# Altium PCB ILI2511_FPC_TX23RX41_20170830.PcbDoc
Units mm, origin at the board's own origin, x right, y up, seen from the top; angles counter-clockwise.
Board outline 60.1 x 74 mm, 2 copper layers (Top Layer, Bottom Layer); 3 components, 65 nets, 145 pads, 110 vias.
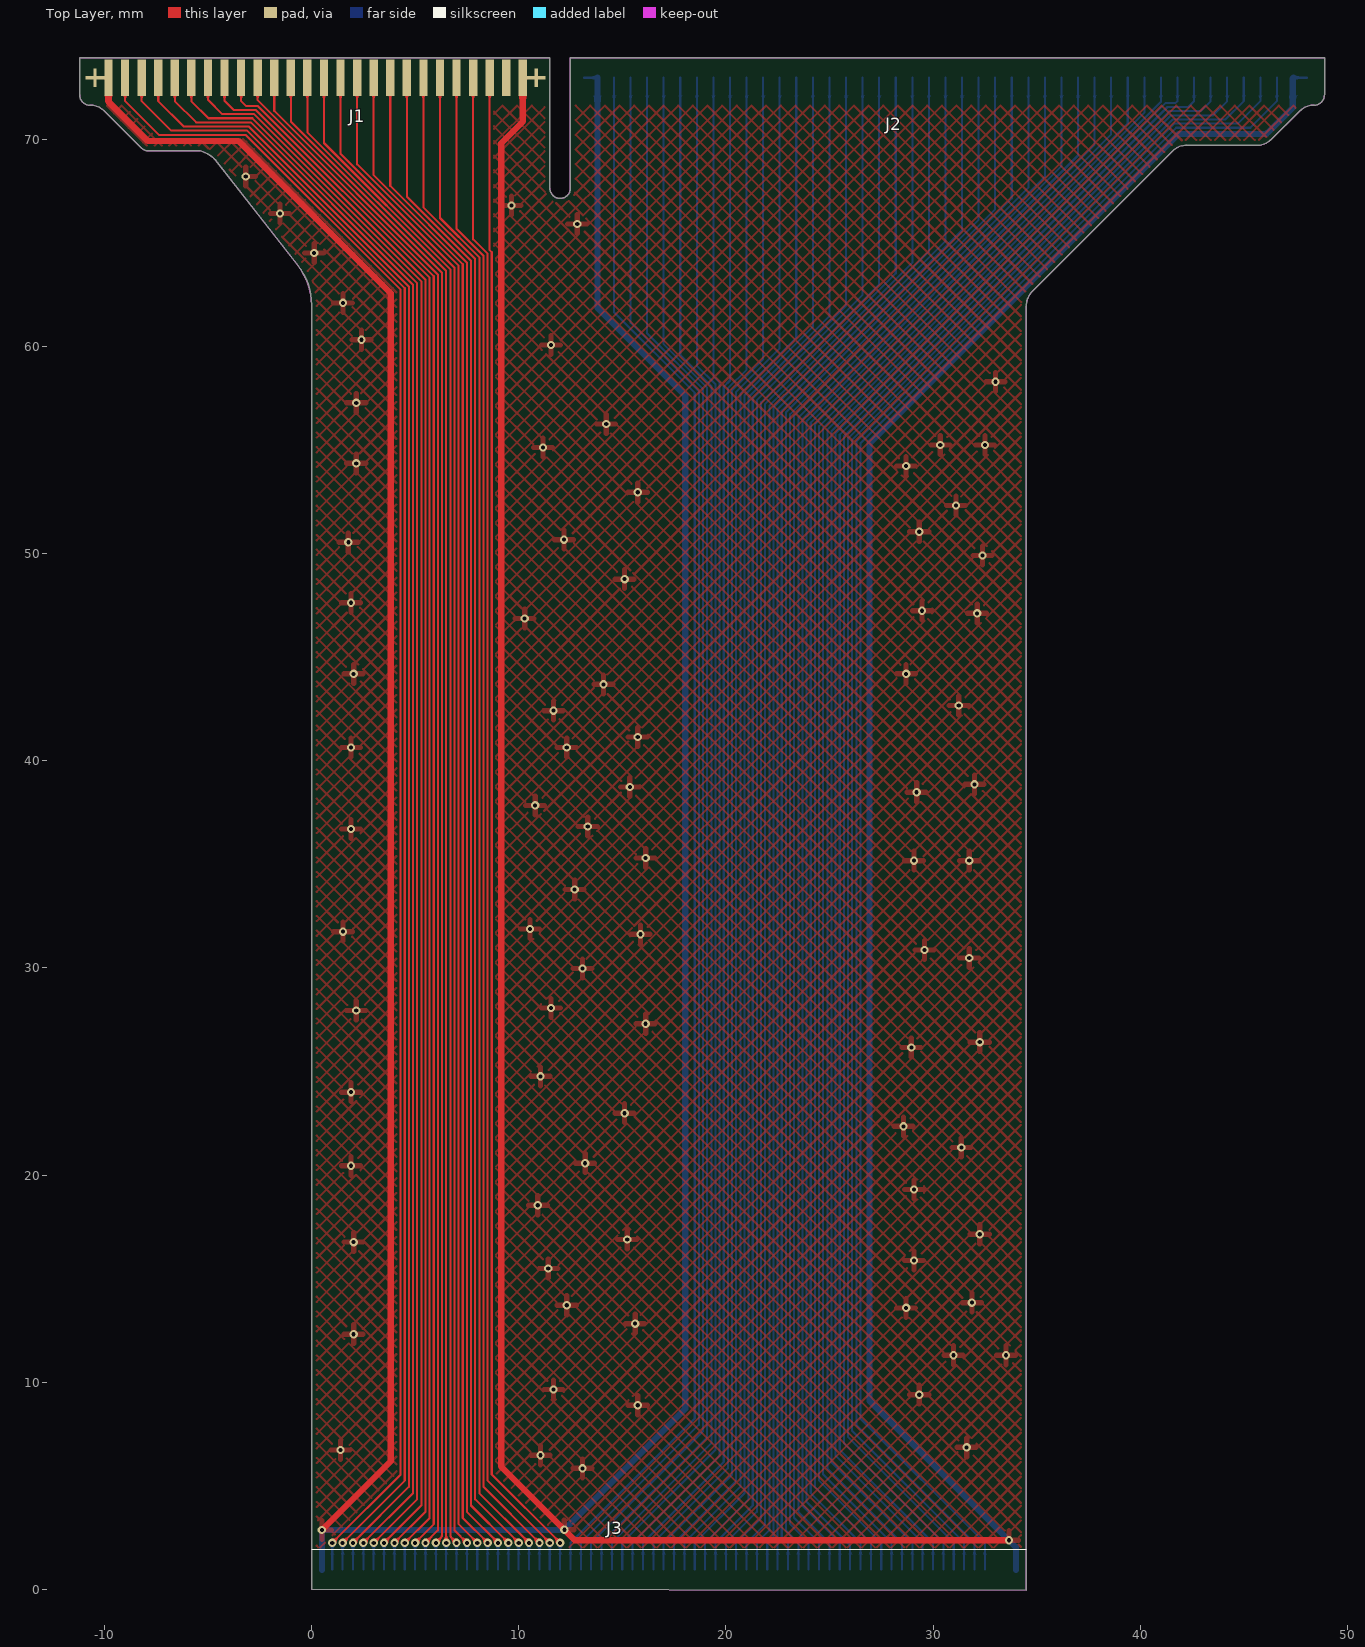
[diagram p0: Top Layer view]
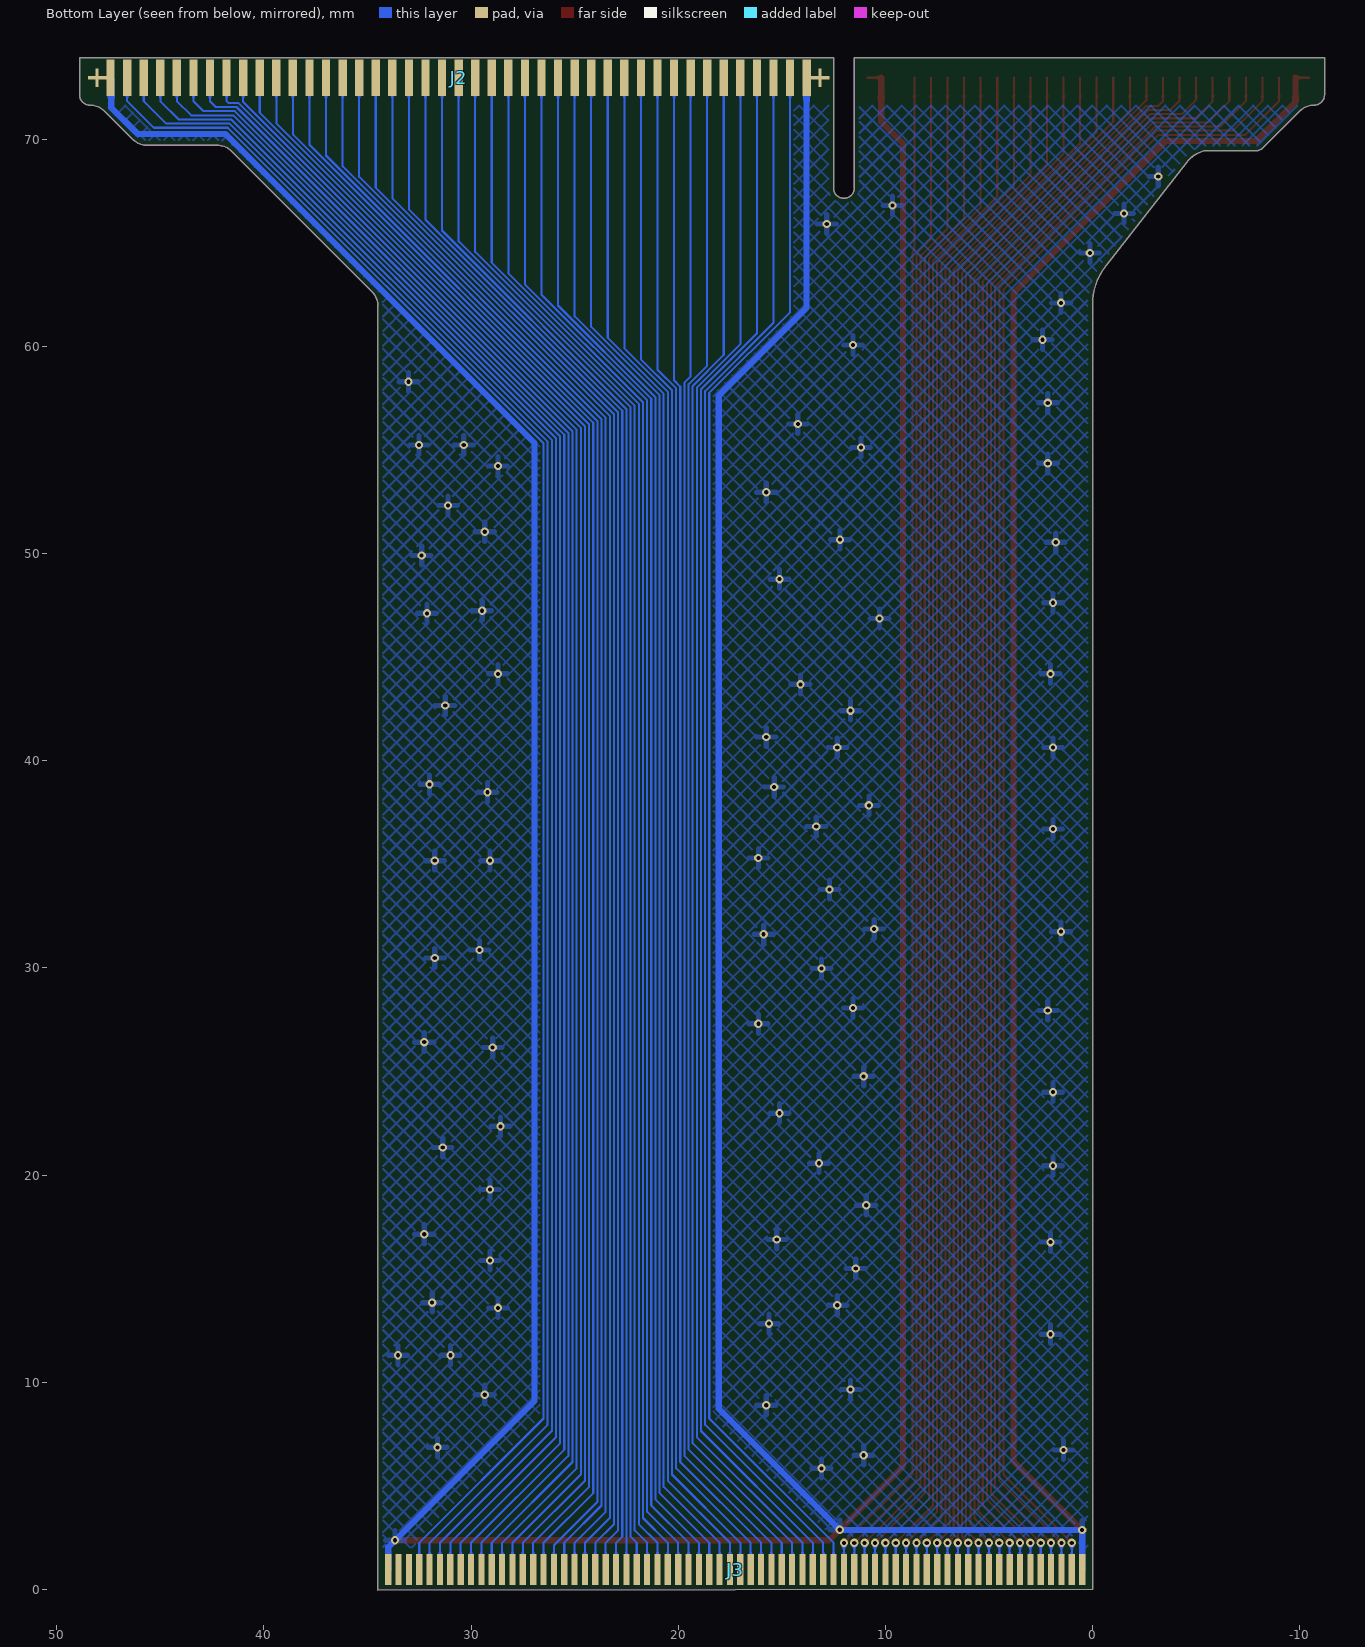
[diagram p1: Bottom Layer view, seen from below]

## Layer stack, top to bottom
Top Solder: solder mask 0.0102, Solder Resist, Dk 3.5
Top Layer: signal copper 0.0356
Dielectric 1: dielectric 0.32, FR-4, Dk 4.8
Bottom Layer: signal copper 0.0356
Bottom Solder: solder mask 0.0102, Solder Resist, Dk 3.5

## Board outline
0,0 0,62 ccw(c-3.1,62) -0.657,63.909 -4.547,68.888 ccw(c-5.762,67.967) -5.372,69.44 -7.872,69.44 cw(c-7.872,69.94) -8.225,69.587 -9.993,71.355 ccw(c-10.7,70.647) -10.7,71.647 cw(c-10.7,72.147) -11.2,72.147 -11.2,73.947 11.5,73.947 11.5,67.647 ccw(c12,67.647) 12.5,67.647 12.5,73.947 48.9,73.947 48.9,72.147 cw(c48.4,72.147) 48.4,71.647 ccw(c48.4,70.647) 47.693,71.355 46.339,70.001 cw(c45.632,70.708) 45.632,69.708 42.229,69.708 ccw(c42.229,68.784) 41.576,69.437 34.793,62.655 ccw(c35.5,61.947) 34.5,61.947 34.5,-0.053

## Design rules (kind name [scope] priority, off if disabled: settings)
Clearance Clearance_1 [InNetClass('All Nets') vs InNetClass('All Nets')] p1: gap=0.1
Clearance [OnLayer('Keep-Out Layer')] p2: gap=0.2 except(0: Arc-SMDPad Track-SMDPad)
MinimumSolderMaskSliver [All] p1: minsoldermaskwidth=0.1
PolygonConnect [All] p1: connectstyle=Relief reliefconductorwidth=0.254 reliefentries=4 polygonreliefangle="90 Angle" airgapwidth=0.254
RoutingVias [All] p1: holewidth=0.2 width=0.4 viastyle="Through Hole" minholewidth=0.2 minwidth=0.4 maxholewidth=0.711 maxwidth=1.27
SilkToSolderMaskClearance [IsPad] p1: minsilkscreentomaskgap=0 clearancetoexposedcopper=TRUE
SolderMaskExpansion [All] p1: expansion=0.102
Width [All] p1: maxlimit=0.5 minlimit=0.1 preferedwidth=0.1
28 further rules are at their usual default settings.

## Components (designator, comment, footprint, x,y, rotation, side; value= is the part's Value field where it differs from the comment)
J1 "CON-26PIN" CON_26PIN -10,72.097 r0 top
J2 "CON_43PIN" CON_43PIN 13.6,72.097 r0 top locked
J3 "CON_68PIN" CON-68PIN 0.35,0.2 r0 top locked

## Footprints (in the part's own frame and the unit in brackets; to place one, negate y for a bottom-side part, rotate by r counter-clockwise, add the part's x,y. Pads: shape width x height; smd on the part's side, far side on the other; paste and mask are expansions set on the pad)
CON-68PIN [mm]
  rect 0.3x1.5 smd far side: 1(0.15,0.75) 2(0.65,0.75) 3(1.15,0.75) 4(1.65,0.75) 5(2.15,0.75) 6(2.65,0.75) 7(3.15,0.75) 8(3.65,0.75) 9(4.15,0.75) 10(4.65,0.75) 11(5.15,0.75) 12(5.65,0.75) 13(6.15,0.75) 14(6.65,0.75) 15(7.15,0.75) 16(7.65,0.75) 17(8.15,0.75) 18(8.65,0.75) 19(9.15,0.75) 20(9.65,0.75) 21(10.15,0.75) 22(10.65,0.75) 23(11.15,0.75) 24(11.65,0.75) 25(12.15,0.75) 26(12.65,0.75) 27(13.15,0.75) 28(13.65,0.75) 29(14.15,0.75) 30(14.65,0.75) 31(15.15,0.75) 32(15.65,0.75) 33(16.15,0.75) 34(16.65,0.75) 35(17.15,0.75) 36(17.65,0.75) 37(18.15,0.75) 38(18.65,0.75) 39(19.15,0.75) 40(19.65,0.75) 41(20.15,0.75) 42(20.65,0.75) 43(21.15,0.75) 44(21.65,0.75) 45(22.15,0.75) 46(22.65,0.75) 47(23.15,0.75) 48(23.65,0.75) 49(24.15,0.75) 50(24.65,0.75) 51(25.15,0.75) 52(25.65,0.75) 53(26.15,0.75) 54(26.65,0.75) 55(27.15,0.75) 56(27.65,0.75) 57(28.15,0.75) 58(28.65,0.75) 59(29.15,0.75) 60(29.65,0.75) 61(30.15,0.75) 62(30.65,0.75) 63(31.15,0.75) 64(31.65,0.75) 65(32.15,0.75) 66(32.65,0.75) 67(33.15,0.75) 68(33.65,0.75)
CON_26PIN [mm]
  rect 0.4x1.75 smd: 1(0.2,0.875) 2(1,0.875) 3(1.8,0.875) 4(2.6,0.875) 5(3.4,0.875) 6(4.2,0.875) 7(5,0.875) 8(5.8,0.875) 9(6.6,0.875) 10(7.4,0.875) 11(8.2,0.875) 12(9,0.875) 13(9.8,0.875) 14(10.6,0.875) 15(11.4,0.875) 16(12.2,0.875) 17(13,0.875) 18(13.8,0.875) 19(14.6,0.875) 20(15.4,0.875) 21(16.2,0.875) 22(17,0.875) 23(17.8,0.875) 24(18.6,0.875) 25(19.4,0.875) 26(20.2,0.875)
CON_43PIN [mm]
  rect 0.4x1.75 smd far side: 1(0.2,0.875) 2(1,0.875) 3(1.8,0.875) 4(2.6,0.875) 5(3.4,0.875) 6(4.2,0.875) 7(5,0.875) 8(5.8,0.875) 9(6.6,0.875) 10(7.4,0.875) 11(8.2,0.875) 12(9,0.875) 13(9.8,0.875) 14(10.6,0.875) 15(11.4,0.875) 16(12.2,0.875) 17(13,0.875) 18(13.8,0.875) 19(14.6,0.875) 20(15.4,0.875) 21(16.2,0.875) 22(17,0.875) 23(17.8,0.875) 24(18.6,0.875) 25(19.4,0.875) 26(20.2,0.875) 27(21,0.875) 28(21.8,0.875) 29(22.6,0.875) 30(23.4,0.875) 31(24.2,0.875) 32(25,0.875) 33(25.8,0.875) 34(26.6,0.875) 35(27.4,0.875) 36(28.2,0.875) 37(29,0.875) 38(29.8,0.875) 39(30.6,0.875) 40(31.4,0.875) 41(32.2,0.875) 42(33,0.875) 43(33.8,0.875)

## Free pads (board coordinates)
  rect 0.9x0.15 smd: 0(-10.45,72.972) 3(10.85,72.972)
  rect 0.15x0.9 smd: 0(-10.45,72.972) 2(10.85,72.972)
  rect 0.9x0.15 smd far side: 4(13.15,72.972) 6(48.05,72.972)
  rect 0.15x0.9 smd far side: 5(13.15,72.972) 7(48.05,72.972)

## Via types
v1: diameter 0.4, hole 0.2, Top Layer to Bottom Layer, tented both sides, 110 vias

## Nets (pads, with @x,y where several pads share a name; then routed paths per layer and width w, separated by ;. In a path a pad name is that pad's centre, name@x,y a point inside that pad or via, vN(x,y) a via of type N, cw(c..) or ccw(c..) an arc to the next point about the centre after c; other vN are vias at no path point)
ESD_DUMMY: J1.1 J1.26 J2.1 J2.43 J3.1 J3.68 pad.0 pad.2 pad.3 pad.4 pad.5 pad.6 pad.7 | length 349.6
  Top Layer w0.1: pad.0@-10.45,72.972 J1.1 ; J1.26 pad.2
  Top Layer w0.3: J1.1 -9.8,71.811 -7.905,69.917 -3.523,69.917 3.821,62.572 3.821,6.184 v1(0.5,2.863) ; J1.26 10.2,70.856 9.155,69.811 9.155,5.93 v1(12.203,2.882) 12.711,2.374 v1(33.666,2.374)
  Bottom Layer w0.1: pad.4 J2.1 ; J2.43 pad.6
  Bottom Layer w0.3: J3.1 v1(0.5,2.863) 12.184,2.863 v1(12.203,2.882) 18.045,8.724 18.045,57.619 13.8,61.864 J2.1 ; J3.68 34,2.041 v1(33.666,2.374) 26.935,9.105 26.935,55.333 41.859,70.258 46.091,70.258 46.164,70.331 46.174,70.331 47.363,71.52 47.363,72.935 J2.43
  other v1: 13.081,5.842 11.049,6.477 1.397,6.731 31.623,6.858 15.748,8.89 29.337,9.398 11.684,9.652 30.988,11.303 33.528,11.303 2.032,12.319 15.621,12.827 28.702,13.589 12.319,13.716 31.877,13.843 11.43,15.494 29.083,15.875 2.032,16.764 15.24,16.891 32.258,17.145 10.922,18.542 29.083,19.304 1.905,20.447 13.208,20.574 31.369,21.336 28.575,22.352 15.113,22.987 1.905,24.003 11.049,24.765 28.956,26.162 32.258,26.416 16.129,27.305 2.159,27.94 11.557,28.067 13.081,29.972 31.75,30.48 29.591,30.861 15.875,31.623 1.524,31.75 10.541,31.877 12.7,33.782 29.083,35.179 31.75,35.179 16.129,35.306 1.905,36.703 13.335,36.83 10.795,37.846 29.21,38.481 15.367,38.735 32.004,38.862 1.905,40.64 12.319,40.64 15.748,41.148 11.684,42.418 31.242,42.672 14.097,43.688 2.032,44.196 28.702,44.196 10.287,46.863 32.131,47.117 29.464,47.244 1.905,47.625 15.113,48.768 32.385,49.911 1.778,50.546 12.192,50.673 29.337,51.054 31.115,52.324 15.748,52.959 28.702,54.229 2.159,54.356 11.176,55.118 30.353,55.245 32.512,55.245 14.224,56.261 2.159,57.277 33.02,58.293 11.557,60.071 2.413,60.325 1.524,62.103 0.127,64.516 12.827,65.913 -1.524,66.421 9.652,66.802 -3.175,68.199
RX1: J2.2 J3.25 | length 76.1
  Bottom Layer w0.1: J3.25 12.5,2.247 18.5,8.247 18.5,57.759 14.6,61.659 J2.2
RX2: J2.3 J3.26 | length 75.8
  Bottom Layer w0.1: J3.26 13,2.247 18.7,7.947 18.7,57.842 15.4,61.142 J2.3
RX3: J2.4 J3.27 | length 75.4
  Bottom Layer w0.1: J3.27 13.5,2.247 18.9,7.647 18.9,57.925 16.2,60.625 J2.4
RX4: J2.5 J3.28 | length 75
  Bottom Layer w0.1: J3.28 14,2.247 19.1,7.347 19.1,58.008 17,60.108 J2.5
RX5: J2.6 J3.29 | length 74.6
  Bottom Layer w0.1: J3.29 14.5,2.247 19.3,7.047 19.3,58.091 17.8,59.591 J2.6
RX6: J2.7 J3.30 | length 74.3
  Bottom Layer w0.1: J3.30 15,2.247 19.5,6.747 19.5,58.174 18.6,59.074 J2.7
RX7: J2.8 J3.31 | length 73.9
  Bottom Layer w0.1: J3.31 15.5,2.247 19.7,6.447 19.7,58.256 19.4,58.556 J2.8
RX8: J2.9 J3.32 | length 73.8
  Bottom Layer w0.1: J3.32 16,2.247 19.9,6.147 19.9,58.056 20.2,58.357 J2.9
RX9: J2.10 J3.33 | length 73.9
  Bottom Layer w0.1: J3.33 16.5,2.247 20.1,5.847 20.1,57.974 21,58.874 J2.10
RX10: J2.11 J3.34 | length 74
  Bottom Layer w0.1: J3.34 17,2.247 20.3,5.547 20.3,57.891 21.8,59.391 J2.11
RX11: J2.12 J3.35 | length 74.1
  Bottom Layer w0.1: J3.35 17.5,2.247 20.5,5.247 20.5,57.808 22.6,59.908 J2.12
RX12: J2.13 J3.36 | length 74.3
  Bottom Layer w0.1: J3.36 18,2.247 20.7,4.947 20.7,57.725 23.4,60.425 J2.13
RX13: J2.14 J3.37 | length 74.4
  Bottom Layer w0.1: J3.37 18.5,2.247 20.9,4.647 20.9,57.642 24.2,60.942 J2.14
RX14: J2.15 J3.38 | length 74.5
  Bottom Layer w0.1: J3.38 19,2.247 21.1,4.347 21.1,57.559 25,61.459 J2.15
RX15: J2.16 J3.39 | length 74.6
  Bottom Layer w0.1: J3.39 19.5,2.247 21.3,4.047 21.3,57.477 25.8,61.977 J2.16
RX16: J2.17 J3.40 | length 74.8
  Bottom Layer w0.1: J3.40 20,2.247 21.5,3.747 21.5,57.394 26.6,62.494 J2.17
RX17: J2.18 J3.41 | length 74.9
  Bottom Layer w0.1: J3.41 20.5,2.247 21.7,3.447 21.7,57.311 27.4,63.011 J2.18
RX18: J2.19 J3.42 | length 75
  Bottom Layer w0.1: J3.42 21,2.247 21.9,3.147 21.9,57.228 28.2,63.528 J2.19
RX19: J2.20 J3.43 | length 75.1
  Bottom Layer w0.1: J3.43 21.5,2.247 22.1,2.847 22.1,57.145 29,64.045 J2.20
RX20: J2.21 J3.44 | length 75.3
  Bottom Layer w0.1: J3.44 22,2.247 22.3,2.547 22.3,57.062 29.8,64.562 J2.21
RX21: J2.22 J3.45 | length 75.4
  Bottom Layer w0.1: J3.45 22.5,56.98 30.6,65.08 J2.22
RX22: J2.23 J3.46 | length 75.8
  Bottom Layer w0.1: J3.46 23,2.247 22.7,2.547 22.7,56.897 31.4,65.597 J2.23
RX23: J2.24 J3.47 | length 76.1
  Bottom Layer w0.1: J3.47 23.5,2.247 22.9,2.847 22.9,56.814 32.2,66.114 J2.24
RX24: J2.25 J3.48 | length 76.5
  Bottom Layer w0.1: J3.48 24,2.247 23.1,3.147 23.1,56.731 33,66.631 J2.25
RX25: J2.26 J3.49 | length 76.9
  Bottom Layer w0.1: J3.49 24.5,2.247 23.3,3.447 23.3,56.648 33.8,67.148 J2.26
RX26: J2.27 J3.50 | length 77.2
  Bottom Layer w0.1: J3.50 25,2.247 23.5,3.747 23.5,56.565 34.6,67.665 J2.27
RX27: J2.28 J3.51 | length 77.6
  Bottom Layer w0.1: J3.51 25.5,2.247 23.7,4.047 23.7,56.482 35.4,68.183 J2.28
RX28: J2.29 J3.52 | length 78
  Bottom Layer w0.1: J3.52 26,2.12 23.9,4.22 23.9,56.4 36.2,68.7 J2.29
RX29: J2.30 J3.53 | length 78.4
  Bottom Layer w0.1: J3.53 26.5,2.247 24.1,4.647 24.1,56.317 37,69.217 J2.30
RX30: J2.31 J3.54 | length 78.7
  Bottom Layer w0.1: J3.54 27,2.247 24.3,4.947 24.3,56.234 37.8,69.734 J2.31
RX31: J2.32 J3.55 | length 79.1
  Bottom Layer w0.1: J3.55 27.5,2.247 24.5,5.247 24.5,56.151 38.6,70.251 J2.32
RX32: J2.33 J3.56 | length 79.5
  Bottom Layer w0.1: J3.56 28,2.247 24.7,5.547 24.7,56.068 39.4,70.768 J2.33
RX33: J2.34 J3.57 | length 79.9
  Bottom Layer w0.1: J3.57 28.5,2.247 24.9,5.847 24.9,55.985 40.2,71.285 J2.34
RX34: J2.35 J3.58 | length 80.2
  Bottom Layer w0.1: J3.58 29,2.247 25.1,6.147 25.1,55.903 41,71.803 J2.35
RX35: J2.36 J3.59 | length 80.9
  Bottom Layer w0.1: J3.59 29.5,2.247 25.3,6.447 25.3,55.82 41.238,71.758 41.714,71.758 41.8,71.843 J2.36
RX36: J2.37 J3.60 | length 81.6
  Bottom Layer w0.1: J3.60 30,2.247 25.5,6.747 25.5,55.737 41.321,71.558 42.314,71.558 42.6,71.843 J2.37
RX37: J2.38 J3.61 | length 82.2
  Bottom Layer w0.1: J3.61 30.5,2.247 25.7,7.047 25.7,55.654 41.404,71.358 42.914,71.358 43.4,71.843 J2.38
RX38: J2.39 J3.62 | length 82.9
  Bottom Layer w0.1: J3.62 31,2.247 25.9,7.347 25.9,55.571 41.487,71.158 43.514,71.158 44.2,71.843 J2.39
RX39: J2.40 J3.63 | length 83.6
  Bottom Layer w0.1: J3.63 31.5,2.247 26.1,7.647 26.1,55.488 41.57,70.958 44.114,70.958 45,71.843 J2.40
RX40: J2.41 J3.64 | length 84.3
  Bottom Layer w0.1: J3.64 32,2.247 26.3,7.947 26.3,55.406 41.652,70.758 44.714,70.758 45.8,71.843 J2.41
RX41: J2.42 J3.65 | length 84.9
  Bottom Layer w0.1: J3.65 32.5,2.247 26.5,8.247 26.5,55.323 41.735,70.558 45.314,70.558 46.6,71.843 J2.42
TX1: J1.2 J3.2 | length 81.3
  Top Layer w0.1: J1.2 -9,71.843 -7.373,70.217 -3.188,70.217 4.3,62.728 4.3,5.547 v1(1,2.247)
  Bottom Layer w0.1: J3.2 v1(1,2.247)
TX2: J1.3 J3.3 | length 80.7
  Top Layer w0.1: J1.3 -8.2,71.843 -6.773,70.417 -3.105,70.417 4.5,62.811 4.5,5.247 v1(1.5,2.247)
  Bottom Layer w0.1: J3.3 v1(1.5,2.247)
TX3: J1.4 J3.4 | length 80
  Top Layer w0.1: J1.4 -7.4,71.843 -6.173,70.617 -3.022,70.617 4.7,62.894 4.7,4.947 v1(2,2.247)
  Bottom Layer w0.1: J3.4 v1(2,2.247)
TX4: J1.5 J3.5 | length 79.3
  Top Layer w0.1: J1.5 -6.6,71.843 -5.573,70.817 -2.94,70.817 4.9,62.977 4.9,4.647 v1(2.5,2.247)
  Bottom Layer w0.1: J3.5 v1(2.5,2.247)
TX5: J1.6 J3.6 | length 78.6
  Top Layer w0.1: J1.6 -5.8,71.843 -4.973,71.017 -2.857,71.017 5.1,63.06 5.1,4.347 v1(3,2.247)
  Bottom Layer w0.1: J3.6 v1(3,2.247)
TX6: J1.7 J3.7 | length 77.9
  Top Layer w0.1: J1.7 -5,71.901 -4.315,71.217 -2.774,71.217 5.3,63.143 5.3,4.047 v1(3.5,2.247)
  Bottom Layer w0.1: J3.7 v1(3.5,2.247)
TX7: J1.8 J3.8 | length 77.3
  Top Layer w0.1: J1.8 -4.2,71.863 -3.753,71.417 -2.691,71.417 5.5,63.226 5.5,3.747 v1(4,2.247)
  Bottom Layer w0.1: J3.8 v1(4,2.247)
TX8: J1.9 J3.9 | length 76.6
  Top Layer w0.1: J1.9 -3.4,71.843 -3.173,71.617 -2.608,71.617 5.7,63.308 5.7,3.447 v1(4.5,2.247)
  Bottom Layer w0.1: J3.9 v1(4.5,2.247)
TX9: J1.10 J3.10 | length 75.9
  Top Layer w0.1: J1.10 -2.6,71.891 5.9,63.391 5.9,3.147 v1(5,2.247)
  Bottom Layer w0.1: J3.10 v1(5,2.247)
TX10: J1.11 J3.11 | length 75.5
  Top Layer w0.1: J1.11 -1.8,71.374 6.1,63.474 6.1,2.847 v1(5.5,2.247)
  Bottom Layer w0.1: J3.11 v1(5.5,2.247)
TX11: J1.12 J3.12 | length 75.2
  Top Layer w0.1: J1.12 -1,70.857 6.3,63.557 6.3,2.623 6.299,2.622 6.299,2.607 6.296,2.604 6.296,2.59 6.292,2.585 6.292,2.573 6.286,2.567 6.286,2.556 6.277,2.548 6.277,2.539 6.268,2.529 6.268,2.522 6.256,2.51 6.256,2.505 6.227,2.476 6.227,2.475 v1(6,2.247)
  Bottom Layer w0.1: J3.12 v1(6,2.247)
TX12: J1.13 J3.13 | length 74.8
  Top Layer w0.1: J1.13 -0.2,70.34 6.5,63.64 v1(6.5,2.247)
  Bottom Layer w0.1: J3.13 v1(6.5,2.247)
TX13: J1.14 J3.14 | length 74.7
  Top Layer w0.1: J1.14 0.6,69.823 6.7,63.723 6.7,2.623 6.701,2.622 6.701,2.607 6.704,2.604 6.704,2.59 6.708,2.585 6.708,2.573 6.714,2.567 6.714,2.556 6.722,2.548 6.722,2.539 6.732,2.529 6.732,2.522 6.744,2.51 6.744,2.505 6.758,2.491 6.758,2.49 v1(7,2.247)
  Bottom Layer w0.1: J3.14 v1(7,2.247)
TX14: J1.15 J3.15 | length 74.5
  Top Layer w0.1: J1.15 1.4,69.305 6.9,63.805 6.9,2.847 v1(7.5,2.247)
  Bottom Layer w0.1: J3.15 v1(7.5,2.247)
TX15: J1.16 J3.16 | length 74.4
  Top Layer w0.1: J1.16 2.2,68.788 7.1,63.888 7.1,3.147 v1(8,2.247)
  Bottom Layer w0.1: J3.16 v1(8,2.247)
TX16: J1.17 J3.17 | length 74.3
  Top Layer w0.1: J1.17 3,68.271 7.3,63.971 7.3,3.447 v1(8.5,2.247)
  Bottom Layer w0.1: J3.17 v1(8.5,2.247)
TX17: J1.18 J3.18 | length 74.2
  Top Layer w0.1: J1.18 3.8,67.754 7.5,64.054 7.5,3.747 v1(9,2.247)
  Bottom Layer w0.1: J3.18 v1(9,2.247)
TX18: J1.19 J3.19 | length 74.1
  Top Layer w0.1: J1.19 4.6,67.237 7.7,64.137 7.7,4.047 v1(9.5,2.247)
  Bottom Layer w0.1: J3.19 v1(9.5,2.247)
TX19: J1.20 J3.20 | length 73.9
  Top Layer w0.1: J1.20 5.4,66.72 7.9,64.22 7.9,4.347 v1(10,2.247)
  Bottom Layer w0.1: J3.20 v1(10,2.247)
TX20: J1.21 J3.21 | length 73.8
  Top Layer w0.1: J1.21 6.2,66.202 8.1,64.302 8.1,4.647 v1(10.5,2.247)
  Bottom Layer w0.1: J3.21 v1(10.5,2.247)
TX21: J1.22 J3.22 | length 73.7
  Top Layer w0.1: J1.22 7,65.685 8.3,64.385 8.3,4.947 v1(11,2.247)
  Bottom Layer w0.1: J3.22 v1(11,2.247)
TX22: J1.23 J3.23 | length 73.6
  Top Layer w0.1: J1.23 7.8,65.168 8.5,64.468 8.5,5.247 v1(11.5,2.247)
  Bottom Layer w0.1: J3.23 v1(11.5,2.247)
TX23: J1.24 J3.24 | length 73.4
  Top Layer w0.1: J1.24 8.6,64.651 8.7,64.551 8.7,5.547 v1(12,2.247)
  Bottom Layer w0.1: J3.24 v1(12,2.247)
pads on no net: J1.25 J3.66 J3.67

## Polygon pours and split planes (outlines as drawn)
ESD_DUMMY on Top Layer "Top Layer-No Net" (hatched 45Degree grid 0.5 track 0.1, remove dead copper, pour order 0): -11.176,71.882 -10.922,71.628 48.133,71.628 48.133,15.494 34.671,2.032 -0.02,2.032
ESD_DUMMY on Bottom Layer "Top Layer-No Net" (hatched 45Degree grid 0.5 track 0.1, remove dead copper, pour order 2): -11.176,71.882 -10.922,71.628 48.133,71.628 48.133,15.494 34.671,2.032 -0.02,2.032

## Keep-outs
Keep-Out Layer:
  the board outline again, w0

## Silkscreen, mask and mechanical layers (free items; w line width, h text height)
Top Overlay:
  lines w0: 0,1.947 34.5,1.947